# Altium PCB ESP32-PCB.PcbDoc (part 1 of 3)
Units mil, origin at the board's own origin, x right, y up, seen from the top; angles counter-clockwise.
Board outline 2800 x 1000 mil, 4 copper layers (L1, L2, L3, L4), stack 61.094 mil thick; 64 components, 76 nets, 301 pads, 135 vias.
Unrouted connection lines stored in the file: 2.
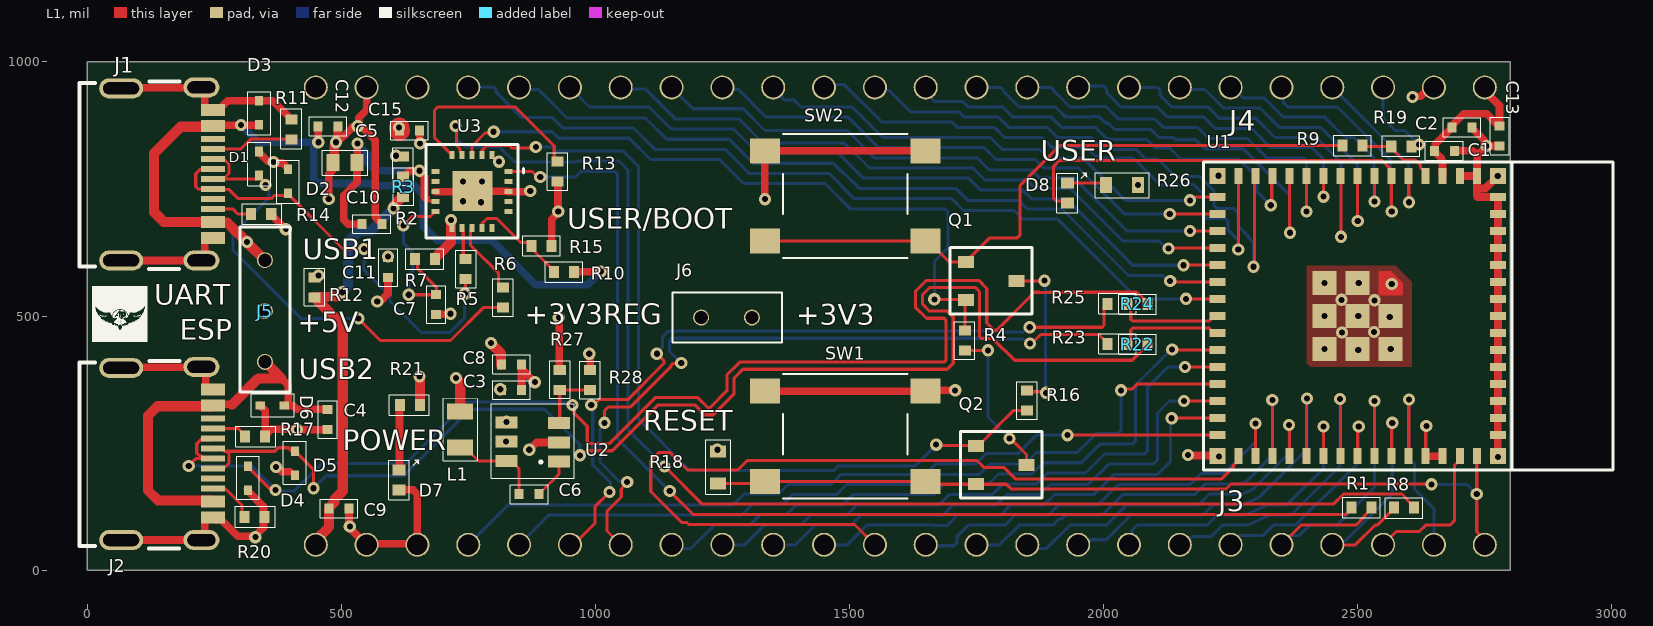
[diagram p0: L1 view]
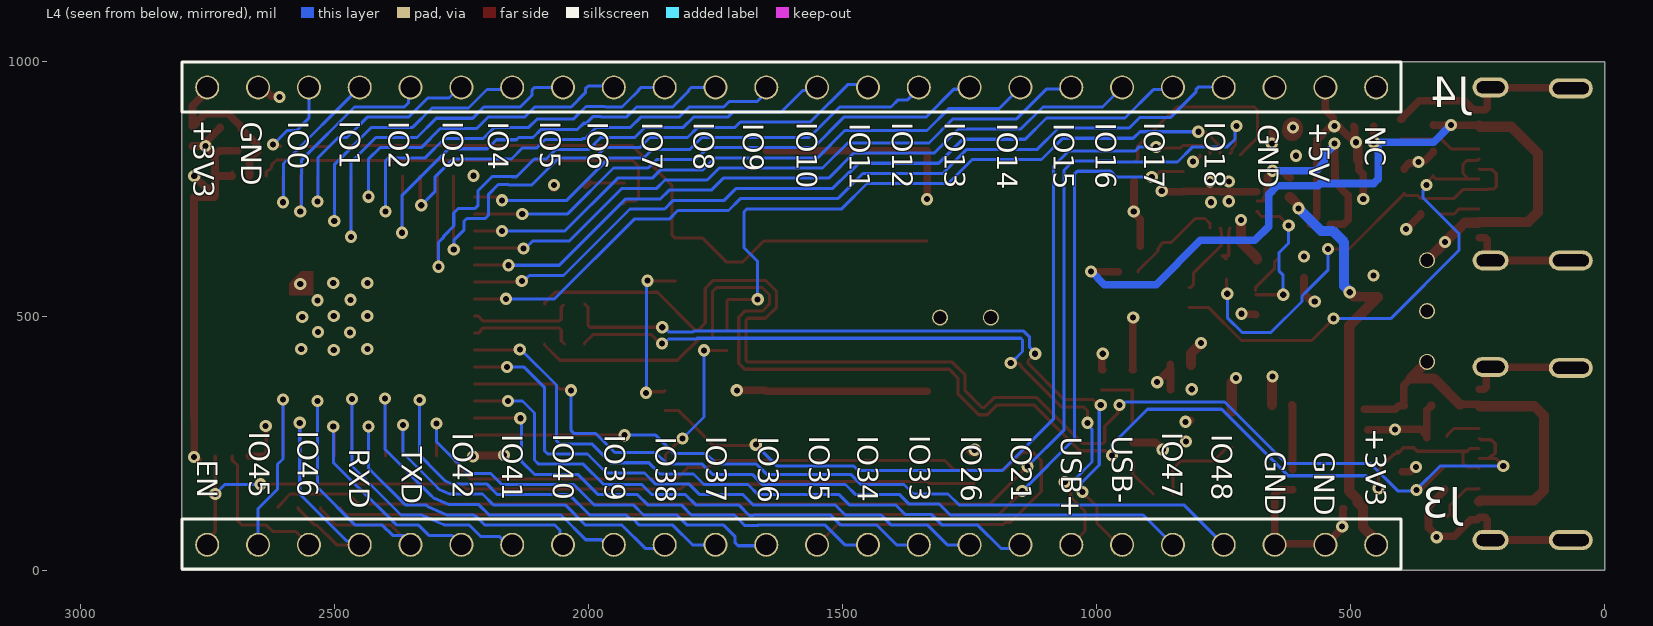
[diagram p1: L4 view, seen from below]
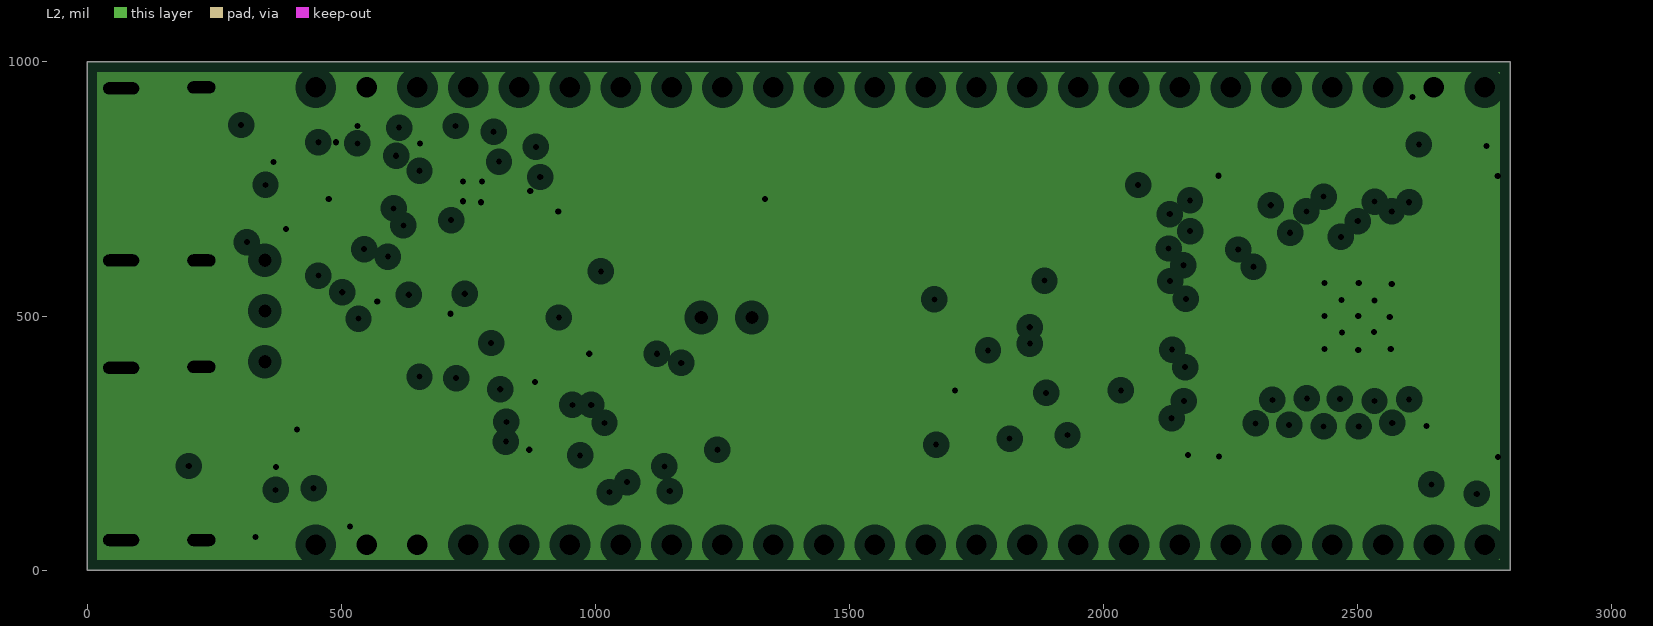
[diagram p2: L2, clearances drawn from the general rule]
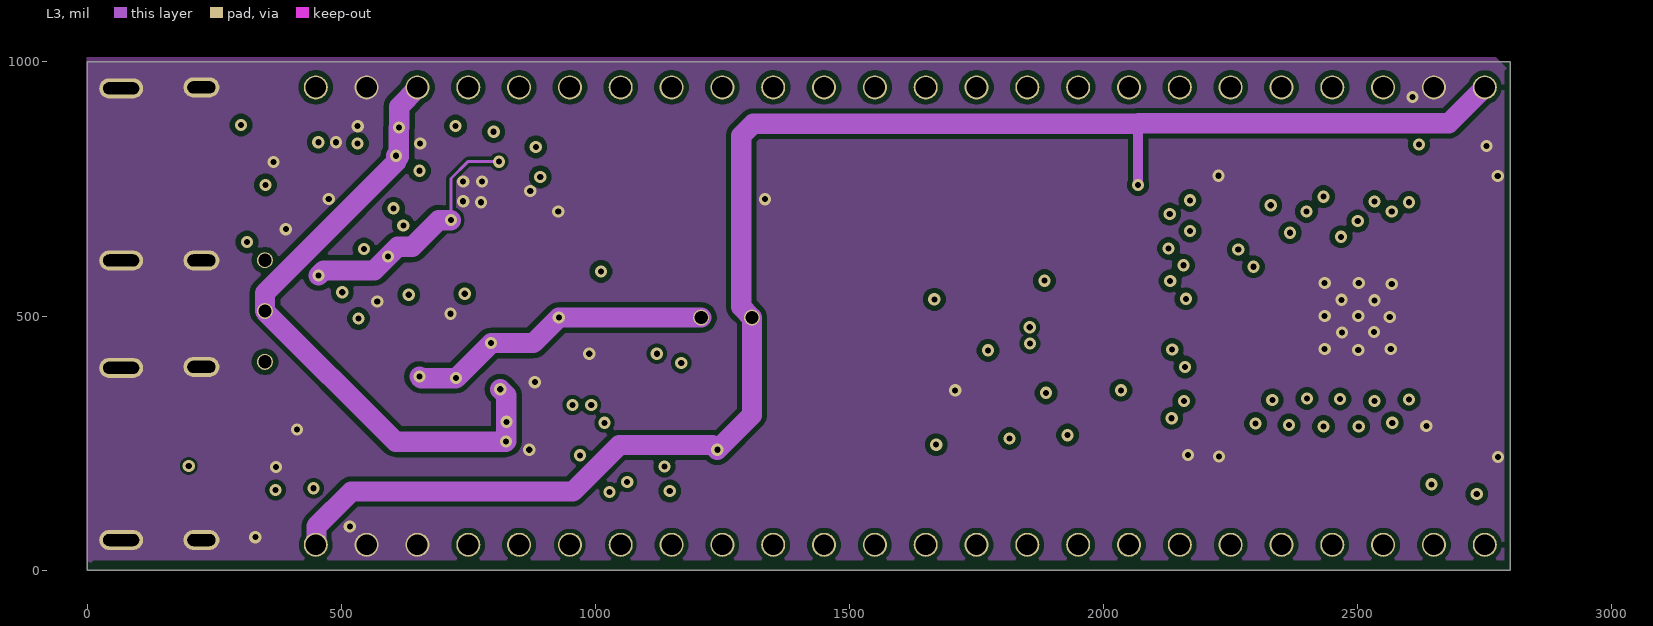
[diagram p3: L3]

## Layer stack, top to bottom
Top Solder: solder mask 0.4, Solder Resist, Dk 3.5
L1: signal copper 1.378
Dielectric 2: prepreg 3.913, PP-006, Dk 4.1
L2: plane copper 0.3543, net GND
Dielectric 1: dielectric 49.8031, FR-4, Dk 4.8
L3: signal copper 0.3543
Dielectric 3: prepreg 3.913, PP-006, Dk 4.1
L4: signal copper 1.378
Bottom Solder: solder mask 0.4, Solder Resist, Dk 3.5

## Board outline
0,0 2800,0 2800,1000 0,1000

## Design rules (kind name [scope] priority, off if disabled: settings)
Clearance SMALLER2 [WithinRoom('USB2')] p1: gap=5 ignorepadtopadclearanceinfootprint=FALSE
Clearance SMALLER1 [WithinRoom('USB1')] p2: gap=5 ignorepadtopadclearanceinfootprint=FALSE
Clearance SMALLER [WithinRoom('FTDI')] p3: gap=6 ignorepadtopadclearanceinfootprint=FALSE
Clearance "DIFF 90 CLEARANCE" [InDifferentialPairClass('DIFF90')] p4: gap=8 ignorepadtopadclearanceinfootprint=FALSE
Clearance [All] p5: gap=10 ignorepadtopadclearanceinfootprint=FALSE except(6: SMDPad-SMDPad)
ComponentClearance R25R24 [InComponent('R25') vs InComponent('R24')] p1: gap=0 collisioncheckmode=3 verticalgap=0 showdistances=FALSE
ComponentClearance R2R3 [InComponent('R2') vs InComponent('R3')] p2: gap=0 collisioncheckmode=3 verticalgap=0 showdistances=FALSE
ComponentClearance R22R23 [InComponent('R22') vs InComponent('R23')] p3: gap=0 collisioncheckmode=3 verticalgap=0 showdistances=FALSE
ComponentClearance [All] p4: gap=10 collisioncheckmode=3 verticalgap=10 showdistances=FALSE
DiffPairsRouting DIFF90 [InDifferentialPairClass('DIFF90')] p1: maxlimit=10 minlimit=8 mostfreqgap=10 toplayer_maxgap=8.1 toplayer_prefgap=8 toplayer_minwidth=6.03 toplayer_maxwidth=6.23 toplayer_prefwidth=6.03 midlayer1_mingap=10 midlayer1_minwidth=15 midlayer1_maxwidth=15 midlayer1_prefwidth=15 bottomlayer_maxgap=8.1 bottomlayer_prefgap=8 bottomlayer_minwidth=6.03 bottomlayer_maxwidth=6.23 bottomlayer_prefwidth=6.03 maxuncoupledlength=1181.1
MinimumSolderMaskSliver [All] p1: minsoldermaskwidth=5.9
PlaneClearance [All] p1: clearance=20
PlaneConnect [All] p1: planeconnectstyle=Direct reliefexpansion=20 reliefentries=4 reliefconductorwidth=10 reliefairgap=10
PolygonConnect [All] p1: connectstyle=Direct reliefconductorwidth=10 reliefentries=4 polygonreliefangle="90 Angle" airgapwidth=10
RoomDefinition USB2 [False vs False] p1: confinementstyle=ConfineIn formatcopy=TRUE lockcomponents=FALSE outline 5,438 284,438 284,11 5,11
RoomDefinition USB1 [False vs False] p2: confinementstyle=ConfineIn formatcopy=TRUE lockcomponents=FALSE outline 3,979 282,979 282,572 3,572
RoomDefinition FTDI [False] p3: confinementstyle=ConfineIn formatcopy=TRUE lockcomponents=FALSE outline 667,833 856,833 856,656 667,656
RoutingVias [All] p1: holewidth=12 width=24 viastyle="Through Hole" minholewidth=12 minwidth=24 maxholewidth=12 maxwidth=24
SilkToSilkClearance [All] p1: silktosilkclearance=6
SilkToSolderMaskClearance [IsPad] p1: minsilkscreentomaskgap=6 clearancetoexposedcopper=TRUE
SolderMaskExpansion [All] p1: expansion=4 istentingtop=FALSE
SupplyNets "Schematic Supply Nets_5" [InNet('GND')] p1: voltage=0.000
SupplyNets "Schematic Supply Nets_4" [InNet('+3V3_REG')] p2: voltage=0.000
SupplyNets "Schematic Supply Nets_3" [InNet('+5V_VBUS2')] p3: voltage=0.000
SupplyNets "Schematic Supply Nets_2" [InNet('+5V')] p4: voltage=0.000
SupplyNets "Schematic Supply Nets_1" [InNet('+3V3')] p5: voltage=0.000
SupplyNets "Schematic Supply Nets" [InNet('+5V_VBUS1')] p6: voltage=0.000
Width [All] p1: maxlimit=100 minlimit=6 preferedwidth=10 minimp=50.000000 maximp=50.000000 favimp=50.000000
23 further rules are at their usual default settings.

## Classes and differential pairs
differential pair class DIFF90: CON2_USB CON_ESP_USB ESP_USB FTDI_USB
differential pair CON_ESP_USB: +CON_ESP_USB_P -CON_ESP_USB_N
differential pair FTDI_USB: +FTDI_USB_P -FTDI_USB_N
differential pair ESP_USB: +ESP_USB_P -ESP_USB_N
differential pair CON2_USB: +CON2_USB_P -CON2_USB_N

## Components (designator, comment, footprint, x,y, rotation, side; value= is the part's Value field where it differs from the comment)
C1 "10uF/25V" CL05A106MP8NUB8 2690.37,834.84 r180 top value=10uF
C2 "100nF/50V" CL05A106MP8NUB8 2725,880.84 r180 top value=1uF
C3 "2.2uF/50V" CL05A106MP8NUB8 815,345.16 r0 top value=2.2uF
C4 "100nF/50V" CL05A106MP8NUB8 482.84,276.63 r90 top value=1uF
C5 "4.7uF/50V" CC0603KRX7R9BB104 475.88,786.25 r0 top value=100nF
C6 "100nF/50V" CL05A106MP8NUB8 850,140.16 r0 top value=1uF
C7 "100nF/50V" CL05A106MP8NUB8 696.76,502.71 r90 top value=1uF
C8 "10uF/25V" CL05A106MP8NUB8 855,414.84 r180 top value=10uF
C9 "100nF/50V" CL05A106MP8NUB8 515.37,130.84 r180 top value=1uF
C10 "100nF/50V" CL05A106MP8NUB8 580,690.84 r180 top value=1uF
C11 "100nF/50V" CL05A106MP8NUB8 601.84,575.63 r90 top value=1uF
C12 "100nF/50V" CL05A106MP8NUB8 494,882.84 r180 top value=1uF
C13 "100nF/50V" CL05A106MP8NUB8 2788.84,834.63 r90 top value=1uF
C15 "100nF/50V" CL05A106MP8NUB8 654.37,874.84 r180 top value=1uF
D1 "ESD PROTECTION" ESD5Z3.3T1G 320,833.62 r270 top
D2 "ESD PROTECTION" ESD5Z3.3T1G 376.89,799.09 r270 top
D3 "ESD PROTECTION" ESD5Z3.3T1G 320,933.62 r270 top
D4 "ESD PROTECTION" ESD5Z3.3T1G 335.11,147.16 r90 top
D5 "ESD PROTECTION" ESD5Z3.3T1G 427.11,177.16 r90 top
D6 "ESD PROTECTION" ESD5Z3.3T1G 330.91,305.89 r0 top
D7 "YELLOW GREEN" VLMG1500-GS08 596.28,213.12 r270 top
D8 "RED" VLMG1500-GS08 1911.28,777.75 r270 top
J1 "2171790001" 217179-0001 -15.55,959.06 r270 top locked
J2 "2171790001" 217179-0001 -15.55,409.06 r270 top locked
J3 "DS1021-1x24SF11-B" DS1021-1X24SF11 3442.52,-96.46 r180 bottom locked
J4 "DS1021-1x24SF11-B" DS1021-1X24SF11 3442.52,803.54 r180 bottom locked
J5 "B-2100S03P-A110" B-2100S03P-A110 350,410 r90 top
J6 "B-2100S02P-A110" B-2100S02P-A110 1159,448 r0 top
L1 "3.3uF" MLZ2012N3R3LT000 764.8,221.06 r90 top
Q1 "SS8050-G" SS8050-G 1779.2,569.4 r270 top
Q2 "SS8050-G" SS8050-G 1799.2,206.6 r270 top
R1 "0 OHM" RC0402JR 2538.39,138.55 r180 top value=0R
R2 "0 OHM" RC0402JR 606.45,825.02 r270 top value=0R
R3 "0 OHM" RC0402JR 637.55,723.61 r90 top value=0R
R4 "10k" RC0402JR 1711.45,483.02 r270 top value=10kR
R5 "27K" RC0402JR 760.55,561.61 r90 top value=27kR
R6 "27K" RC0402JR 833.55,505.61 r90 top value=27kR
R7 "0 OHM" RC0402JR 695.39,627.55 r180 top value=0R
R8 "0 OHM" RC0402JR 2559.98,107.45 r0 top value=0R
R9 "27K" RC0402JR 2458.98,820.45 r0 top value=27kR
R10 "4.7K" RC0402JR 907.61,571.45 r0 top value=4.7kR
R11 "5.1K" AC0402FR-075K1L 417.55,836.61 r90 top value=5.1kR
R12 "0 OHM" RC0402JR 462.55,525.98 r90 top value=0R
R13 "10k" RC0402JR 910.45,815.39 r270 top value=10kR
R14 "5.1K" AC0402FR-075K1L 311.98,685.45 r0 top value=5.1kR
R15 "10k" RC0402JR 925.02,653.55 r180 top value=10kR
R16 "10k" RC0402JR 1864.55,302.98 r90 top value=10kR
R17 "5.1K" AC0402FR-075K1L 299.98,247.45 r0 top value=5.1kR
R18 "1K" 0603WAF1001T5E 1263.05,153.29 r90 top
R19 "27K" RC0402JR 2616.39,849.55 r180 top value=27kR
R20 "5.1K" AC0402FR-075K1L 298.98,89.45 r0 top value=5.1kR
R21 "5.1K" AC0402FR-075K1L 666.02,340.55 r180 top value=5.1kR
R22 "0 OHM" RC0402JR 2035.98,429.45 r0 top value=0R
R23 "0 OHM" RC0402JR 2058.02,460.55 r180 top value=0R
R24 "0 OHM" RC0402JR 2035.61,508.45 r0 top value=0R
R25 "0 OHM" RC0402JR 2058.02,539.55 r180 top value=0R
R26 "1K" 0603WAF1001T5E 1987.29,735.95 r0 top
R27 "51K" RC0402JR 945.55,343.98 r90 top value=51kR
R28 "22.1K" RC0402JR 974.45,405.39 r270 top value=22.1kR
SW1 "PTS645SM43SMTR92LFS" PTS645SM43SMTR92LFS 1613.78,385.63 r180 top locked
SW2 "PTS645SM43SMTR92LFS" PTS645SM43SMTR92LFS 1613.78,858.46 r180 top locked
U1 "ESP32-S3-MINI-1U-N8" ESP32-S3-MINI-1U-N8_1 2803.15,803.15 r270 top locked
U2 "LMR50410Y3FQDBVRQ1" LMR50410Y3FQDBVRQ1 842.72,313.43 r180 top
U3 "FT231XQ-R" FT231XQ-R 679.26,667.26 r0 top

## Footprints (in the part's own frame and the unit in brackets; to place one, negate y for a bottom-side part, rotate by r counter-clockwise, add the part's x,y. Pads: shape width x height; smd on the part's side, far side on the other; paste and mask are expansions set on the pad)
0603WAF1001T5E [mm]
  rect 0.6x0.8 smd mask+0.1: 1(0.45,0.55) 2(2.05,0.56)
  silkscreen extent -0.1,-0.08 2.62,1.17, body extent 0.45,0.16 2.05,0.96, height 0.43
217179-0001 [mm]
  rect 0.6x1.2 smd mask+0: A1B12(1.35,6.68) A4B9(2.15,6.68) B1A12(7.75,6.68) B4A9(6.95,6.68)
  rect 0.3x1.2 smd mask+0: A5(3.3,6.68) A6(4.3,6.68) A7(4.8,6.68) A8(5.8,6.68) B5(6.3,6.68) B6(5.3,6.68) B7(3.8,6.68) B8(2.8,6.68)
  oval 1x1.8 hole 0.6 slot 1.4 at 90 deg mask+0: S1(0.23,6.11) S2(8.88,6.11)
  oval 1x2.2 hole 0.6 slot 1.8 at 90 deg mask+0: S3(0.28,2.1) S4(8.88,2.1)
  silkscreen extent -0.08,0 9.3,5.01, body extent 0.15,-0.25 9.09,6.51, height 1.67
AC0402FR-075K1L [mm]
  rect 0.5x0.6 smd mask+0.01: 1(0.28,0.395) 2(1.28,0.395)
  silkscreen extent -0.18,-0.13 1.8,0.91, body extent 0.28,0.15 1.28,0.65, height 0.37
B-2100S02P-A110 [mm]
  round 0.8 hole 0.66: 1(1.25,1.25) 2(3.79,1.25)
  silkscreen extent -0.18,0 5.3,2.51, body extent 0.03,-0.02 5.11,2.48, height 9.5
B-2100S03P-A110 [mm]
  round 0.8 hole 0.66: 1(0,0) 2(2.54,0) 3(5.08,0)
  silkscreen extent -1.5,-1.25 6.75,1.25, body extent -1.23,-1.3 6.39,1.2, height 9.5
CC0603KRX7R9BB104 [mm]
  rect 0.65x0.85 smd mask+0.05: 1(0.2,0.4) 2(1.4,0.4)
  silkscreen extent -0.33,-0.23 1.93,1.02, body extent 0,0 1.6,0.8, height 0.9
CL05A106MP8NUB8 [mm]
  rect 0.45x0.5 smd mask+0.05: 1(0,0.25) 2(1,0.25)
  silkscreen extent -0.43,-0.23 1.45,0.71, body extent 0,0 1,0.5, height 0.9
DS1021-1X24SF11 [mm]
  round 1.2 hole 1.02 mask+0.13: 1(17.59,3.72) 2(20.13,3.72) 3(22.67,3.72) 4(25.21,3.72) 5(27.75,3.72) 6(30.29,3.72) 7(32.83,3.72) 8(35.37,3.72) 9(37.91,3.72) 10(40.45,3.72) 11(42.99,3.72) 12(45.53,3.72) 13(48.07,3.72) 14(50.61,3.72) 15(53.15,3.72) 16(55.69,3.72) 17(58.23,3.72) 18(60.77,3.72) 19(63.31,3.72) 20(65.85,3.72) 21(68.39,3.72) 22(70.93,3.72) 23(73.47,3.72) 24(76.01,3.72)
  silkscreen extent 16.33,2.5 77.25,5, body extent 16.29,2.45 77.22,5, height 9.24
ESD5Z3.3T1G [mm]
  rect 0.48x0.4 smd mask+0: 1(0.25,0.46) 2(1.45,0.46)
  silkscreen extent -0.2,-0.1 1.96,1.04, body extent 0.05,0.06 1.65,0.86, height 0.7
ESP32-S3-MINI-1U-N8_1 [mm]
  rect 0.8x0.8 smd mask+0.05: 1(0.7,-0.7) 1(0.7,-14.7) 1(14.7,-0.7) 1(14.7,-14.7)
  rect 0.8x0.4 smd mask+0.05: 1(0.7,-1.75) 1(0.7,-2.6) 1(14.7,-4.3) 1(14.7,-3.45) 3(0.7,-3.45) 4(0.7,-4.3) 5(0.7,-5.15) 6(0.7,-6) 7(0.7,-6.85) 8(0.7,-7.7) 9(0.7,-8.55) 10(0.7,-9.4) 11(0.7,-10.25) 12(0.7,-11.1) 13(0.7,-11.95) 14(0.7,-12.8) 15(0.7,-13.65) 31(14.7,-13.65) 32(14.7,-12.8) 33(14.7,-11.95) 34(14.7,-11.1) 35(14.7,-10.25) 36(14.7,-9.4) 37(14.7,-8.55) 38(14.7,-7.7) 39(14.7,-6.85) 40(14.7,-6) 41(14.7,-5.15) 44(14.7,-2.6) 45(14.7,-1.75)
  rect 0.4x0.8 smd mask+0.05: 1(1.75,-0.7) 1(2.6,-0.7) 1(3.45,-0.7) 1(4.3,-0.7) 1(5.15,-0.7) 1(6,-0.7) 1(6.85,-0.7) 1(7.7,-0.7) 1(8.55,-0.7) 1(9.4,-0.7) 1(10.25,-0.7) 1(11.1,-0.7) 1(11.95,-0.7) 1(12.8,-0.7) 1(13.65,-0.7) 16(1.75,-14.7) 17(2.6,-14.7) 18(3.45,-14.7) 19(4.3,-14.7) 20(5.15,-14.7) 21(6,-14.7) 22(6.85,-14.7) 23(7.7,-14.7) 24(8.55,-14.7) 25(9.4,-14.7) 26(10.25,-14.7) 27(11.1,-14.7) 28(11.95,-14.7) 29(12.8,-14.7) 30(13.65,-14.7)
  rect 1.2x1.2 smd mask+0.05: 1(6.05,-9.35) 1(6.05,-7.7) 1(7.7,-9.35) 1(7.7,-7.7) 1(7.7,-6.05) 1(9.35,-9.35) 1(9.35,-7.7) 1(9.35,-6.05)
  round 0.025 smd mask+0.05: 1(6.05,-6.05)
  L1 region: 5.45,-6.05 6.06,-5.45 6.65,-5.45 6.65,-6.65 5.45,-6.65
  silkscreen extent 0,-15.4 15.4,5.05, body extent -0.01,-15.37 15.39,5.13, height 2.4
FT231XQ-R [mm]
  rect 0.4x0.25 smd mask+0.05: 1(3.8,2.975) 2(3.8,2.475) 3(3.8,1.975) 4(3.8,1.475) 5(3.8,0.975) 11(0.15,0.975) 12(0.15,1.475) 13(0.15,1.975) 14(0.15,2.475) 15(0.15,2.975)
  rect 0.25x0.4 smd mask+0.05: 6(2.975,0.15) 7(2.475,0.15) 8(1.975,0.15) 9(1.475,0.15) 10(0.975,0.15) 16(0.975,3.8) 17(1.475,3.8) 18(1.975,3.8) 19(2.475,3.8) 20(2.975,3.8)
  rect 2x2 smd mask+0.05: 21(2,2)
  silkscreen extent -0.3,-0.36 4.55,4.32, body extent -0.07,-0.07 4.03,4.03, height 0.8
LMR50410Y3FQDBVRQ1 [mm]
  rect 1.1x0.6 smd mask+0: 1(-2.175,2.525) 2(-2.175,1.575) 3(-2.175,0.6) 4(0.45,0.575) 5(0.45,1.525) 6(0.45,2.5)
  silkscreen extent -2.95,-0.36 1.19,3.35, body extent -2.27,0.08 0.53,2.98, height 1.2
MLZ2012N3R3LT000 [mm]
  rect 0.8x1.3 smd mask+0.05: 1(0.51,0.78) 2(2.31,0.78)
  silkscreen extent -0.15,-0.1 2.97,1.63, body extent 0.41,0.15 2.41,1.4, height 1.05
PTS645SM43SMTR92LFS [mm]
  rect 1.5x1.25 smd mask+0.05: 1(-0.92,5.35) 1(7.12,5.35) 3(-0.92,0.85) 3(7.12,0.85)
  silkscreen extent -0.01,0 6.2,6.2, body extent -1.38,0.07 7.62,6.07, height 4.3
RC0402JR [mm]
  rect 0.5x0.6 smd mask+0.01: 1(0.28,0.395) 2(1.28,0.395)
  silkscreen extent -0.15,-0.13 1.73,0.89, body extent 0.28,0.15 1.28,0.65, height 0.37
SS8050-G [mm]
  rect 0.6x0.8 smd: 1(0,1.25) 2(-0.95,-1.275) 3(0.95,-1.275)
  silkscreen extent -1.68,-2.06 1.65,2.03, body extent -1.46,-1.19 1.44,1.21, height 1.15
VLMG1500-GS08 [mm]
  rect 0.55x0.65 smd mask+0.05: 1(0.4,0.45) 2(1.4,0.45)
  silkscreen extent -0.1,-0.08 1.88,1.42, body extent 0.41,0.21 1.41,0.71, height 0.36

## Part data
C1 C8: library part CL05A106MP8NUB8, "Ceramic Capacitor, Multilayer, Ceramic, 10V, 20% +Tol, 20% -Tol, X5R, 15% TC, 10uF, Surface Mount, 0402", Capacitor Type=Ceramic, Case/Package=0402, LCSCPART NUMBER=C307415, Manufacturer=Samsung, Max Operating Temperature=85°C, Min Operating Temperature=-55°C, Package Shape=Rectangular, Rated DC Voltage (URdc)=10V, Supplier Part Number=187-CL05A106MP8NUB8, Temperature Characteristics Code=X5R, Tolerance  (fill in as +-)=20%, Category="Ceramic Capacitors", ComponentLink1Description=https://datasheet.ciiva.com:443/pdfs/VipMasterIC/IC/SEMS/SEMS-S-A0008521219/SEMS-S-A0008521325-1.pdf?src-supplier=IHS+Markit, ComponentLink1URL=https://datasheet.ciiva.com:443/pdfs/VipMasterIC/IC/SEMS/SEMS-S-A0008521219/SEMS-S-A0008521325-1.pdf?src-supplier=IHS+Markit, ComponentLink2Description=http://www.samsungsem.com/kr/support/product-search/mlcc/CL05A106MP8NUB8.jsp?src-supplier=Digikey, ComponentLink2URL=http://www.samsungsem.com/kr/support/product-search/mlcc/CL05A106MP8NUB8.jsp?src-supplier=Digikey, ComponentLink3Description=https://datasheet.octopart.com/CL05A106MP8NUB8-Samsung-Electro-Mechanics-datasheet-136460857.pdf?src-supplier=Future+Electronics, ComponentLink3URL=https://datasheet.octopart.com/CL05A106MP8NUB8-Samsung-Electro-Mechanics-datasheet-136460857.pdf?src-supplier=Future+Electronics, Dielectric Material=Ceramic, JESD-609 Code=e3, Manufacturer Part Number=CL05A106MP8NUB8, Mounting Technology="Surface Mount", Multilayer=Yes, Packaging="Tape and Reel", Pins=2, Pricing="1=0.32, 10=0.159, 50=0.159, 100=0.102, 1000=0.086, 10000=0.067 (USD)", Reach SVHC Compliant=Yes, RoHS=Yes, RoHS Compliant=Yes, Stock=496808, Supplier=Mouser, Terminal Finish=Nickel, Termination=Wraparound, Tolerance (fill in as +-)=20%
C2 C4 C6 C7 C9 C10 C11 C12 C13 C15: library part CL10A105KP8NNNC, "Ceramic Capacitor, Multilayer, Ceramic, 10V, 10% +Tol, 10% -Tol, X5R, 15% TC, 1uF, Surface Mount, 0603", Capacitor Type=Ceramic, Case/Package=0603, LCSC PART NUMBER=C14445, Manufacturer=Samsung, Max Operating Temperature=85°C, Min Operating Temperature=-55°C, Package Shape=Rectangular, Package Style=SMTMeter, Rated DC Voltage (URdc)=10V, Supplier Part Number=187-CL10A105KP8NNNC, Temperature Characteristics Code=X5R, Tolerance  (fill in as +-)=10%, Category="Ceramic Capacitors", ComponentLink1Description=https://datasheet.ciiva.com:443/pdfs/VipMasterIC/IC/SEMS/SEMS-S-A0008521003/SEMS-S-A0008520845-1.pdf?src-supplier=IHS+Markit, ComponentLink1URL=https://datasheet.ciiva.com:443/pdfs/VipMasterIC/IC/SEMS/SEMS-S-A0008521003/SEMS-S-A0008520845-1.pdf?src-supplier=IHS+Markit, ComponentLink2Description=https://datasheet.ciiva.com/15195/getdatasheetpartid-358616-15195708.pdf?src-supplier=Verical, ComponentLink2URL=https://datasheet.ciiva.com/15195/getdatasheetpartid-358616-15195708.pdf?src-supplier=Verical, ComponentLink3Description=https://datasheet.ciiva.com/16358/cl05b104kq5nnnc-16358431.pdf?src-supplier=Future+Electronics, ComponentLink3URL=https://datasheet.ciiva.com/16358/cl05b104kq5nnnc-16358431.pdf?src-supplier=Future+Electronics, Dielectric Material=Ceramic, Height=0.9mm, JESD-609 Code=e3, Length=1.6mm, Manufacturer Part Number=CL10A105KP8NNNC, Mounting Technology="Surface Mount", Multilayer=Yes, Packaging="Tape and Reel", Pins=2, Pricing="1=0.1, 10=0.018, 50=0.018, 100=0.011, 1000=0.009, 10000=0.005 (USD)", Reach SVHC Compliant=Yes, RoHS=Yes, RoHS Compliant=Yes, Stock=76214, Supplier=Mouser, Terminal Finish=Nickel, Termination=Wraparound, Tolerance (fill in as +-)=10%, Width=0.8mm
C3: library part CL10A225KB8NNNC, "Ceramic Capacitor, Multilayer, Ceramic, 50V, 10% +Tol, 10% -Tol, X5R, 15% TC, 2.2uF, Surface Mount, 0603", Capacitor Type=Ceramic, Case/Package=0603, LCSC PART NUMBER=C913904, Manufacturer=Samsung, Max Operating Temperature=85°C, Min Operating Temperature=-55°C, Package Shape=Rectangular, Rated DC Voltage (URdc)=50V, Temperature Characteristics Code=X5R, Tolerance  (fill in as +-)=10%, Category="Ceramic Capacitors", ComponentLink1Description=https://datasheet.ciiva.com:443/pdfs/VipMasterIC/IC/SEMS/SEMS-S-A0008526420/SEMS-S-A0008525294-1.pdf?src-supplier=IHS+Markit, ComponentLink1URL=https://datasheet.ciiva.com:443/pdfs/VipMasterIC/IC/SEMS/SEMS-S-A0008526420/SEMS-S-A0008525294-1.pdf?src-supplier=IHS+Markit, Dielectric Material=Ceramic, Manufacturer Part Number=CL10A225KB8NNNC, Mounting Technology="Surface Mount", Multilayer=Yes, Packaging="Tape and Reel", Pins=2, Pricing="20=0.0212, 200=0.017, 600=0.0152, 4000=0.0117, 8000=0.0111, 20000=0.0108 (USD)", Reach SVHC Compliant=Yes, RoHS=Yes, RoHS Compliant=Yes, Stock=400299, Supplier=LCSC, Supplier Part Number=C913904, Termination=Wraparound, Tolerance (fill in as +-)=10%
C5: library part CC0603KRX7R9BB104, "Ceramic Capacitor, Multilayer, Ceramic, 50V, 10% +Tol, 10% -Tol, X7R, 15% TC, 0.1uF, Surface Mount, 0603", Capacitor Type=Ceramic, Case/Package=0603, LCSC PART NUMBER=C14663, Manufacturer=Yageo, Max Operating Temperature=125°C, Min Operating Temperature=-55°C, Package Shape=Rectangular, Package Style=SMTMeter, Rated DC Voltage (URdc)=50V, Supplier Part Number=3035896, Temperature Characteristics Code=X7R, Tolerance  (fill in as +-)=10%, Category="Ceramic Capacitors", ComponentLink1Description=https://datasheet.ciiva.com:443/pdfs/VipMasterIC/IC/YAGO/YAGO-S-A0003557223/YAGO-S-A0003557223-1.pdf?src-supplier=IHS+Markit, ComponentLink1URL=https://datasheet.ciiva.com:443/pdfs/VipMasterIC/IC/YAGO/YAGO-S-A0003557223/YAGO-S-A0003557223-1.pdf?src-supplier=IHS+Markit, ComponentLink2Description=https://datasheet.ciiva.com/11786/0900766b80d84f1d-11786061.pdf?src-supplier=Rs, ComponentLink2URL=https://datasheet.ciiva.com/11786/0900766b80d84f1d-11786061.pdf?src-supplier=Rs, ComponentLink3Description=https://datasheet.ciiva.com/8033/70765-8033819.pdf?src-supplier=Element14, ComponentLink3URL=https://datasheet.ciiva.com/8033/70765-8033819.pdf?src-supplier=Element14, ComponentLink4Description=https://datasheet.ciiva.com/8033/70765-8033821.pdf?src-supplier=Element14, ComponentLink4URL=https://datasheet.ciiva.com/8033/70765-8033821.pdf?src-supplier=Element14, ComponentLink5Description=https://datasheet.ciiva.com/7978/1489800-7978166.pdf?src-supplier=Element14, ComponentLink5URL=https://datasheet.ciiva.com/7978/1489800-7978166.pdf?src-supplier=Element14, ComponentLink6Description=https://datasheet.ciiva.com/31394/1489800-31394927.pdf?src-supplier=Farnell, ComponentLink6URL=https://datasheet.ciiva.com/31394/1489800-31394927.pdf?src-supplier=Farnell, ComponentLink7Description=https://datasheet.ciiva.com/22749/1489800-22749214.pdf?src-supplier=Element14, ComponentLink7URL=https://datasheet.ciiva.com/22749/1489800-22749214.pdf?src-supplier=Element14, ComponentLink8Description=https://datasheet.ciiva.com/144/mlccorderingcode-144177.pdf?src-supplier=Digikey, ComponentLink8URL=https://datasheet.ciiva.com/144/mlccorderingcode-144177.pdf?src-supplier=Digikey, ComponentLink9Description=https://datasheet.ciiva.com/144/mlccorderingcode-144176.pdf?src-supplier=Digikey, ComponentLink9URL=https://datasheet.ciiva.com/144/mlccorderingcode-144176.pdf?src-supplier=Digikey, ComponentLink10Description=https://datasheet.ciiva.com/144/mlccorderingcode-144178.pdf?src-supplier=Digikey, ComponentLink10URL=https://datasheet.ciiva.com/144/mlccorderingcode-144178.pdf?src-supplier=Digikey, Dielectric Material=Ceramic, Height=0.8mm, JESD-609 Code=e3, Length=1.6mm, Manufacturer Part Number=CC0603KRX7R9BB104, Mounting Technology="Surface Mount", Multilayer=Yes, Packaging="Tape and Reel", Pins=2, Pricing="4000=0.0049, 16000=0.0047, 60000=0.0045, 160000=0.0044, 400000=0.0042 (USD)", Reach SVHC Compliant=Yes, RoHS=Yes, RoHS Compliant=Yes, Stock=11484000, Supplier="Future Electronics", Terminal Finish=Nickel, Termination=Wraparound, Tolerance (fill in as +-)=10%, Width=0.8mm
D1 D2 D3 D4 D5 D6: library part ESD5Z3.3T1G, "Trans Voltage Suppressor Diode, 158W, 3.3V V(RWM), Unidirectional, 1 Element, Silicon", Clamping Voltage-Max=8.4V, LCSC PART NUMBER=C61148, Manufacturer="ON Semiconductor", Max Operating Temperature=150°C, Max Power Dissipation=200mW, Min Breakdown Voltage=5V, Min Operating Temperature=-55°C, Non-rep Peak Rev Power Dis-Max=158W, Package Body Material=Plastic, Package Shape=Rectangular, Package Style="SMALL OUTLINEMeter", Rep Pk Reverse Voltage-Max=3.3V, Supplier Part Number=8196941, Additional Feature="UL RECOGNIZED", Category="ESD and Circuit Protection ICs", ComponentLink1Description=https://datasheet.ciiva.com:443/pdfs/VipMasterIC/IC/ONSM/ONSM-S-A0006325923/ONSM-S-A0006325923-1.pdf?src-supplier=IHS+Markit, ComponentLink1URL=https://datasheet.ciiva.com:443/pdfs/VipMasterIC/IC/ONSM/ONSM-S-A0006325923/ONSM-S-A0006325923-1.pdf?src-supplier=IHS+Markit, Diode Element Material=SILICON, Diode Type="TRANS VOLTAGE SUPPRESSOR", JESD-30 Code=R-PDSO-F2, JESD-609 Code=e3, Manufacturer Part Number=ESD5Z3.3T1G, Moisture Sensitivity Level=1, Number of Elements=1, Pins=2, Polarity=Unidirectional, Pricing="3000=0.0569, 9000=0.0547, 15000=0.0538, 45000=0.0518, 75000=0.05 (USD)", Qualification Status="Not Qualified", Reach SVHC Compliant=Yes, Reference Standard=IEC-61000-4-2, RoHS=Yes, RoHS Compliant=Yes, Stock=1197000, Supplier="Future Electronics", Surface Mount=Yes, Technology=AVALANCHE, Terminal Finish=Tin, Terminal Form=Flat, Terminal Position=DUAL
D7: library part VLMG1500-GS08, "Single Color LED, Yellow Green, 0.5mm", Color=Green,Yellow, Color@wavelength=Green, Forward Current=30mA, Forward Voltage=2.4V, LCSC PART NUMBER=C511404, Manufacturer=Vishay, Max Operating Temperature=85°C, Min Operating Temperature=-30°C, Reverse Voltage-Max=5V, Supplier Part Number=2044562, Category=LEDs, Channels=1, ComponentLink1Description=https://datasheet.ciiva.com:443/pdfs/VipMasterIC/IC/VISH/VISH-S-A0003457490/VISH-S-A0003457490-1.pdf?src-supplier=IHS+Markit, ComponentLink1URL=https://datasheet.ciiva.com:443/pdfs/VipMasterIC/IC/VISH/VISH-S-A0003457490/VISH-S-A0003457490-1.pdf?src-supplier=IHS+Markit, ComponentLink2Description=https://datasheet.ciiva.com/12071/vlmo1500-244705-12071911.pdf?src-supplier=Mouser, ComponentLink2URL=https://datasheet.ciiva.com/12071/vlmo1500-244705-12071911.pdf?src-supplier=Mouser, ComponentLink3Description=https://datasheet.ciiva.com/30005/vlmo1500-30005134.pdf?src-supplier=Avnet, ComponentLink3URL=https://datasheet.ciiva.com/30005/vlmo1500-30005134.pdf?src-supplier=Avnet, Luminous Intensity-Nom=90mcd, Manufacturer Part Number=VLMG1500-GS08, Mounting Technology="Surface Mount", Optoelectronic Device Type="SINGLE COLOR LED", Overall Height=0.35mm, Packaging="Tape and Reel", Pins=2, Pricing="3000=0.0548, 6000=0.0534, 12000=0.0521, 15000=0.0516, 45000=0.0491 (USD)", Reach SVHC Compliant=Yes, RoHS=Yes, RoHS Compliant=Yes, Shape=Rectangular, Size=0.5mm, Stock=30000, Supplier="Future Electronics", Terminal Pitch=0.95mm, Viewing Angle=130°
D8: library part VLMS1500-GS08, "Single Color LED, Super Red, 0.5mm", Color=Red, Forward Current=30mA, Forward Voltage=2.4V, LCSC PART NUMBER=C511370, Manufacturer=Vishay, Max Operating Temperature=85°C, Min Operating Temperature=-30°C, Reverse Voltage-Max=5V, Supplier Part Number=78-VLMS1500-GS08, Category=LEDs, Channels=1, Color@wavelength=Red, ComponentLink1Description=https://datasheet.ciiva.com:443/pdfs/VipMasterIC/IC/VISH/VISH-S-A0003457490/VISH-S-A0003457490-1.pdf?src-supplier=IHS+Markit, ComponentLink1URL=https://datasheet.ciiva.com:443/pdfs/VipMasterIC/IC/VISH/VISH-S-A0003457490/VISH-S-A0003457490-1.pdf?src-supplier=IHS+Markit, ComponentLink2Description=http://www.farnell.com/datasheets/1809983.pdf?src-supplier=Farnell, ComponentLink2URL=http://www.farnell.com/datasheets/1809983.pdf?src-supplier=Farnell, ComponentLink3Description=http://www.mouser.com/ds/2/427/vlmo1500-244705.pdf?src-supplier=Mouser, ComponentLink3URL=http://www.mouser.com/ds/2/427/vlmo1500-244705.pdf?src-supplier=Mouser, ComponentLink4Description=http://www.alliedelec.com/m/d/cfc385e1097fc985ee9a50a3551ac188.pdf?src-supplier=Allied+Electronics, ComponentLink4URL=http://www.alliedelec.com/m/d/cfc385e1097fc985ee9a50a3551ac188.pdf?src-supplier=Allied+Electronics, ComponentLink5Description=https://datasheet.octopart.com/VLMS1500-GS08-Vishay-datasheet-62332426.pdf?src-supplier=Newark, ComponentLink5URL=https://datasheet.octopart.com/VLMS1500-GS08-Vishay-datasheet-62332426.pdf?src-supplier=Newark, ComponentLink6Description=https://datasheet.octopart.com/VLMS1500-GS08-Vishay-datasheet-33014519.pdf?src-supplier=Element14, ComponentLink6URL=https://datasheet.octopart.com/VLMS1500-GS08-Vishay-datasheet-33014519.pdf?src-supplier=Element14, ComponentLink7Description=http://datasheet.octopart.com/VLMS1500-GS08-Vishay-datasheet-21227148.pdf?src-supplier=Avnet, ComponentLink7URL=http://datasheet.octopart.com/VLMS1500-GS08-Vishay-datasheet-21227148.pdf?src-supplier=Avnet, ComponentLink8Description=http://www.farnell.com/datasheets/1809983.pdf?src-supplier=Newark, ComponentLink8URL=http://www.farnell.com/datasheets/1809983.pdf?src-supplier=Newark, ComponentLink9Description=http://www.farnell.com/datasheets/2050839.pdf?src-supplier=Newark, ComponentLink9URL=http://www.farnell.com/datasheets/2050839.pdf?src-supplier=Newark, ComponentLink10Description=https://datasheet.octopart.com/VLMS1500-GS08-Vishay-datasheet-21227148.pdf?src-supplier=Future+Electronics, ComponentLink10URL=https://datasheet.octopart.com/VLMS1500-GS08-Vishay-datasheet-21227148.pdf?src-supplier=Future+Electronics, ComponentLink11Description=http://datasheet.octopart.com/VLMS1500-GS08-Vishay-datasheet-21227148.pdf?src-supplier=Quest, ComponentLink11URL=http://datasheet.octopart.com/VLMS1500-GS08-Vishay-datasheet-21227148.pdf?src-supplier=Quest, ComponentLink12Description=http://datasheet.octopart.com/VLMS1500-GS08-Vishay-datasheet-21227148.pdf?src-supplier=NAC+Semi, ComponentLink12URL=http://datasheet.octopart.com/VLMS1500-GS08-Vishay-datasheet-21227148.pdf?src-supplier=NAC+Semi, ComponentLink13Description=http://datasheet.octopart.com/VLMS1500-GS08-Vishay-datasheet-21227148.pdf?src-supplier=LCSC, ComponentLink13URL=http://datasheet.octopart.com/VLMS1500-GS08-Vishay-datasheet-21227148.pdf?src-supplier=LCSC, Luminous Intensity-Nom=54mcd, Manufacturer Part Number=VLMS1500-GS08, Mounting Technology="Surface Mount", Optoelectronic Device Type="SINGLE COLOR LED", Overall Height=0.35mm, Packaging="Tape and Reel", Pins=2, Pricing="1=0.34, 10=0.263, 50=0.263, 100=0.1, 1000=0.089, 10000=0.061 (USD)", Reach SVHC Compliant=Yes, RoHS=Yes, RoHS Compliant=Yes, Shape=Rectangular, Size=0.5mm, Stock=45181, Supplier=Mouser, Terminal Pitch=0.95mm, Viewing Angle=130°
J1 J2: library part 217179-0001, "USB Type C - Connector, Top-mount SMT, 16pos", LCSC PART NUMBER=C3197684, Manufacturer=Molex, Supplier Part Number=3702965, Category="USB Connectors", Manufacturer Part Number=217179-0001, Pricing="1=0.817, 10=0.645, 50=0.57, 100=0.494, 500=0.484, 1000=0.474 (GBP)", RoHS=No, Stock=10084, Supplier=Farnell
J3 J4: LCSC PART NUMBER=C7430380, Manufacturer="Ningbo Connfly Electric", Manufacturer Part Number=DS1021-1x24SF11-B, Pricing="5=0.1027, 50=0.0832, 200=0.0735, 400=0.0662, 2400=0.0603, 5000=0.0574 (USD)", RoHS=No, Stock=439, Supplier=LCSC, Supplier Part Number=C7430380
J5: LCSC PART NUMBER=C124376, Manufacturer=CKMTW, Category=Uncategorized, Manufacturer Part Number=B-2100S03P-A110, Pricing="20=0.0269, 200=0.0224, 600=0.0198, 5000=0.0157, 10000=0.0144, 20000=0.0137 (USD)", RoHS=No, Stock=20930, Supplier=LCSC, Supplier Part Number=C124376
J6: LCSC PART NUMBER=C124375, Manufacturer=CKMTW, Category=Uncategorized, Manufacturer Part Number=B-2100S02P-A110, Pricing="20=0.0234, 200=0.0192, 600=0.0169, 5000=0.0141, 10000=0.0128, 20000=0.0122 (USD)", RoHS=No, Stock=171541, Supplier=LCSC, Supplier Part Number=C124375
L1: library part MLZ2012N3R3LT000, "General Purpose Inductor, 3.3uH, 20%, 1 Element, Ferrite-Core, SMD, 0805", Case/Size Code=0805, DC Resistance (DCR)=150mR, Inductance-Nom (L)=3.3uH, Inductor Type="GENERAL PURPOSE INDUCTOR", LCSC PART NUMBER=C2041461, Manufacturer=TDK, Manufacturer Series=MLZ, Max Current Rating=130mA, Max Operating Temperature=125°C, Min Operating Temperature=-55°C, Package Height=0.85mm, Package Length=2mm, Package Style=SMTMeter, Package Width=1.25mm, Self Resonant Frequency=90MHz, Supplier Part Number=445-6759-2-ND, Tolerance=20%, Category="Fixed Inductors", ComponentLink1Description=https://datasheet.ciiva.com:443/pdfs/VipMasterIC/IC/TDKC/TDKC-S-A0006811741/TDKC-S-A0006811741-1.pdf?src-supplier=IHS+Markit, ComponentLink1URL=https://datasheet.ciiva.com:443/pdfs/VipMasterIC/IC/TDKC/TDKC-S-A0006811741/TDKC-S-A0006811741-1.pdf?src-supplier=IHS+Markit, ComponentLink2Description=https://datasheet.ciiva.com/29690/inductor-commercial-decoupling-mlz-en-29690333.pdf?src-supplier=Digikey, ComponentLink2URL=https://datasheet.ciiva.com/29690/inductor-commercial-decoupling-mlz-en-29690333.pdf?src-supplier=Digikey, ComponentLink3Description=https://datasheet.ciiva.com/29690/inductor-commercial-decoupling-mlz-en-29690334.pdf?src-supplier=Digikey, ComponentLink3URL=https://datasheet.ciiva.com/29690/inductor-commercial-decoupling-mlz-en-29690334.pdf?src-supplier=Digikey, ComponentLink4Description=https://datasheet.ciiva.com/29690/inductor-commercial-decoupling-mlz-en-29690335.pdf?src-supplier=Digikey, ComponentLink4URL=https://datasheet.ciiva.com/29690/inductor-commercial-decoupling-mlz-en-29690335.pdf?src-supplier=Digikey, Construction="Multilayer Chip", Core Material=Ferrite, Manufacturer Part Number=MLZ2012N3R3LT000, Packaging="Tape and Reel", Pricing="4000=0.04378, 8000=0.0412, 12000=0.03991, 28000=0.03863, 100000=0.03734 (USD)", Reach SVHC Compliant=Yes, RoHS=Yes, RoHS Compliant=Yes, Series=MLZ2012, Stock=44000, Supplier=Digikey
Q1 Q2: "Small Signal Bipolar Transistor, 1.5A I(C), 25V V(BR)CEO, 1-Element, NPN, Silicon", LCSC PART NUMBER=C164885, Manufacturer=Comchip, Supplier Part Number=750-SS8050-G, Category=Transistors, ComponentLink1Description=https://datasheet.ciiva.com:443/pdfs/VipMasterIC/IC/COMC/COMC-S-A0004994192/COMC-S-A0004994192-1.pdf?src-supplier=IHS+Markit, ComponentLink1URL=https://datasheet.ciiva.com:443/pdfs/VipMasterIC/IC/COMC/COMC-S-A0004994192/COMC-S-A0004994192-1.pdf?src-supplier=IHS+Markit, ComponentLink2Description="http://www.comchiptech.com/admin/files/product/SS8050-G RevA181526.pdf?src-supplier=Digikey", ComponentLink2URL="http://www.comchiptech.com/admin/files/product/SS8050-G RevA181526.pdf?src-supplier=Digikey", Manufacturer Part Number=SS8050-G, Pricing="1=0.29, 10=0.2, 50=0.2, 100=0.082, 1000=0.057, 10000=0.037 (USD)", Reach SVHC Compliant=Yes, RoHS=Yes, RoHS Compliant=Yes, Stock=4983, Supplier=Mouser
R1 R2 R3 R7 R8 R12 R22 R23 R24 R25: library part RC0402JR-070RL, "Metal Glaze/thick Film, 0.0625W, 0ohm, Surface Mount, 0402", Case/Package=0402, LCSC PART NUMBER=C60485, Manufacturer=Yageo, Max Operating Temperature=155°C, Min Operating Temperature=-55°C, Package Height=0.35mm, Package Length=1mm, Package Shape=Rectangular, Package Style=SMTMeter, Package Width=0.5mm, Power=62.5mW, Rated Temperature=70°C, Resistor Type="FIXED RESISTOR", Supplier Part Number=3375797, Category="Chip SMD Resistors", ComponentLink1Description=https://datasheet.ciiva.com:443/pdfs/VipMasterIC/IC/YAGO/YAGO-S-A0008145938/YAGO-S-A0008145938-1.pdf?src-supplier=IHS+Markit, ComponentLink1URL=https://datasheet.ciiva.com:443/pdfs/VipMasterIC/IC/YAGO/YAGO-S-A0008145938/YAGO-S-A0008145938-1.pdf?src-supplier=IHS+Markit, Construction=Chip, JESD-609 Code=e3, Manufacturer Part Number=RC0402JR-070RL, Mounting Technology="Surface Mount", Packaging="Tape and Reel", Pins=2, Pricing="10000=0.0011, 50000=0.0011, 250000=0.001, 500000=0.001, 1500000=0.0009 (USD)", Reach SVHC Compliant=Yes, RoHS=Yes, RoHS Compliant=Yes, Stock=38530000, Supplier="Future Electronics", Technology="METAL GLAZE/THICK FILM", Terminal Finish=Nickel, Termination=Wraparound
R4 R13 R15 R16: library part RMCF0402FT10K0, "Fixed Resistor, Metal Glaze/thick Film, 0.063W, 10000ohm, 50V, 1% +/-Tol, 100ppm/Cel, Surface Mount, 0402", Case/Package=0402, LCSC PART NUMBER=C6111655, Manufacturer="Stackpole Electronics", Max Operating Temperature=155°C, Min Operating Temperature=-55°C, Package Height=0.3mm, Package Length=1mm, Package Shape=Rectangular, Package Style=SMTMeter, Package Width=0.5mm, Power=63mW, Rated Temperature=70°C, Resistor Type="FIXED RESISTOR", Supplier Part Number=708-RMCF0402FT10K0, Temperature Coefficient=100ppm/°C, Tolerance=1%, Working Voltage=50V, Category="Chip SMD Resistors", ComponentLink1Description=https://datasheet.ciiva.com:443/pdfs/VipMasterIC/IC/SEIE/SEIE-S-A0009541969/SEIE-S-A0009541969-1.pdf?src-supplier=IHS+Markit, ComponentLink1URL=https://datasheet.ciiva.com:443/pdfs/VipMasterIC/IC/SEIE/SEIE-S-A0009541969/SEIE-S-A0009541969-1.pdf?src-supplier=IHS+Markit, ComponentLink2Description=https://datasheet.ciiva.com/24341/sei-rmcp-24341800.pdf?src-supplier=Onlinecomponents.com, ComponentLink2URL=https://datasheet.ciiva.com/24341/sei-rmcp-24341800.pdf?src-supplier=Onlinecomponents.com, Construction=Rectangular, JESD-609 Code=e3, Manufacturer Part Number=RMCF0402FT10K0, Mounting Technology="Surface Mount", Packaging="Tape and Reel", Pins=2, Pricing="1=0.1, 10=0.012, 50=0.012, 100=0.006, 1000=0.005, 10000=0.002 (USD)", Reach SVHC Compliant=Yes, Reference Standard=AEC-Q200, RoHS=Yes, RoHS Compliant=Yes, Stock=4866800, Supplier=Mouser, Technology="METAL GLAZE/THICK FILM", Terminal Finish=Nickel, Termination=Wraparound
R5 R6 R9 R19: library part RC0402JR-0727KL, "Fixed Resistor, Metal Glaze/thick Film, 0.0625W, 27000ohm, 50V, 5% +/-Tol, 100ppm/Cel, Surface Mount, 0402", Case/Package=0402, LCSC PART NUMBER=C137891, Manufacturer=Yageo, Max Operating Temperature=155°C, Min Operating Temperature=-55°C, Package Height=0.35mm, Package Length=1mm, Package Shape=Rectangular, Package Style=SMTMeter, Package Width=0.5mm, Power=62.5mW, Rated Temperature=70°C, Resistor Type="FIXED RESISTOR", Supplier Part Number=7019441, Temperature Coefficient=100ppm/°C, Tolerance=5%, Working Voltage=50V, Additional Feature="LASER TRIMMABLE", Category="Chip SMD Resistors", ComponentLink1Description=https://datasheet.ciiva.com:443/pdfs/VipMasterIC/IC/YAGO/YAGO-S-A0008145938/YAGO-S-A0008145938-1.pdf?src-supplier=IHS+Markit, ComponentLink1URL=https://datasheet.ciiva.com:443/pdfs/VipMasterIC/IC/YAGO/YAGO-S-A0008145938/YAGO-S-A0008145938-1.pdf?src-supplier=IHS+Markit, ComponentLink2Description=https://datasheet.ciiva.com/2452/pyu-r-int-thick-7-2452717.pdf?src-supplier=Digikey, ComponentLink2URL=https://datasheet.ciiva.com/2452/pyu-r-int-thick-7-2452717.pdf?src-supplier=Digikey, ComponentLink3Description=https://datasheet.ciiva.com/2452/pyu-r-int-thick-7-2452718.pdf?src-supplier=Digikey, ComponentLink3URL=https://datasheet.ciiva.com/2452/pyu-r-int-thick-7-2452718.pdf?src-supplier=Digikey, ComponentLink4Description=https://datasheet.ciiva.com/2452/pyu-r-int-thick-7-2452716.pdf?src-supplier=Digikey, ComponentLink4URL=https://datasheet.ciiva.com/2452/pyu-r-int-thick-7-2452716.pdf?src-supplier=Digikey, ComponentLink5Description=https://datasheet.ciiva.com/7850/1018594-7850186.pdf?src-supplier=Element14, ComponentLink5URL=https://datasheet.ciiva.com/7850/1018594-7850186.pdf?src-supplier=Element14, ComponentLink6Description=https://datasheet.ciiva.com/7850/1018594-7850187.pdf?src-supplier=Element14, ComponentLink6URL=https://datasheet.ciiva.com/7850/1018594-7850187.pdf?src-supplier=Element14, ComponentLink7Description=https://datasheet.ciiva.com/16741/pyu-rc0402-51-rohs-l-6-r-16741390.pdf?src-supplier=Future+Electronics, ComponentLink7URL=https://datasheet.ciiva.com/16741/pyu-rc0402-51-rohs-l-6-r-16741390.pdf?src-supplier=Future+Electronics, ComponentLink8Description=https://datasheet.ciiva.com/15189/getdatasheetpartid-329469-15189557.pdf?src-supplier=Verical, ComponentLink8URL=https://datasheet.ciiva.com/15189/getdatasheetpartid-329469-15189557.pdf?src-supplier=Verical, Construction=Chip, JESD-609 Code=e3, Manufacturer Part Number=RC0402JR-0727KL, Mounting Technology="Surface Mount", Packaging="Tape and Reel", Pins=2, Pricing="10000=0.0011, 100000=0.001, 300000=0.001, 750000=0.001, 2000000=0.0009 (USD)", Reach SVHC Compliant=Yes, RoHS=Yes, RoHS Compliant=Yes, Stock=360000, Supplier="Future Electronics", Technology="METAL GLAZE/THICK FILM", Terminal Finish=Nickel, Termination=Wraparound
R10: library part RC0402JR-074K7L, "Fixed Resistor, Metal Glaze/thick Film, 0.0625W, 4700ohm, 50V, 5% +/-Tol, 100ppm/Cel, Surface Mount, 0402", Case/Package=0402, LCSC PART NUMBER=C105870, Manufacturer=Yageo, Max Operating Temperature=155°C, Min Operating Temperature=-55°C, Package Height=0.35mm, Package Length=1mm, Package Shape=Rectangular, Package Style=SMTMeter, Package Width=0.5mm, Power=62.5mW, Rated Temperature=70°C, Resistor Type="FIXED RESISTOR", Supplier Part Number=4909339, Temperature Coefficient=100ppm/°C, Tolerance=5%, Working Voltage=50V, Additional Feature="LASER TRIMMABLE", Category="Chip SMD Resistors", ComponentLink1Description=https://datasheet.ciiva.com:443/pdfs/VipMasterIC/IC/YAGO/YAGO-S-A0008145938/YAGO-S-A0008145938-1.pdf?src-supplier=IHS+Markit, ComponentLink1URL=https://datasheet.ciiva.com:443/pdfs/VipMasterIC/IC/YAGO/YAGO-S-A0008145938/YAGO-S-A0008145938-1.pdf?src-supplier=IHS+Markit, ComponentLink2Description=https://datasheet.ciiva.com/46412/1018594-46412841.pdf?src-supplier=Element14, ComponentLink2URL=https://datasheet.ciiva.com/46412/1018594-46412841.pdf?src-supplier=Element14, ComponentLink3Description=https://datasheet.ciiva.com/2452/pyu-r-int-thick-7-2452612.pdf?src-supplier=Digikey, ComponentLink3URL=https://datasheet.ciiva.com/2452/pyu-r-int-thick-7-2452612.pdf?src-supplier=Digikey, ComponentLink4Description=https://datasheet.ciiva.com/2452/pyu-r-int-thick-7-2452613.pdf?src-supplier=Digikey, ComponentLink4URL=https://datasheet.ciiva.com/2452/pyu-r-int-thick-7-2452613.pdf?src-supplier=Digikey, ComponentLink5Description=https://datasheet.ciiva.com/2452/pyu-r-int-thick-7-2452611.pdf?src-supplier=Digikey, ComponentLink5URL=https://datasheet.ciiva.com/2452/pyu-r-int-thick-7-2452611.pdf?src-supplier=Digikey, ComponentLink6Description=https://datasheet.ciiva.com/7850/1018594-7850223.pdf?src-supplier=Element14, ComponentLink6URL=https://datasheet.ciiva.com/7850/1018594-7850223.pdf?src-supplier=Element14, ComponentLink7Description=https://datasheet.ciiva.com/7850/1018594-7850222.pdf?src-supplier=Element14, ComponentLink7URL=https://datasheet.ciiva.com/7850/1018594-7850222.pdf?src-supplier=Element14, ComponentLink8Description=https://datasheet.ciiva.com/16800/pyu-rc0402-51-rohs-l-6-r-16800266.pdf?src-supplier=Future+Electronics, ComponentLink8URL=https://datasheet.ciiva.com/16800/pyu-rc0402-51-rohs-l-6-r-16800266.pdf?src-supplier=Future+Electronics, Construction=Chip, JESD-609 Code=e3, Manufacturer Part Number=RC0402JR-074K7L, Mounting Technology="Surface Mount", Packaging="Tape and Reel", Pins=2, Pricing="10000=0.0008, 100000=0.0007, 300000=0.0007, 750000=0.0007, 2000000=0.0006 (USD)", Reach SVHC Compliant=Yes, RoHS=Yes, RoHS Compliant=Yes, Stock=17840000, Supplier="Future Electronics", Technology="METAL GLAZE/THICK FILM", Terminal Finish=Nickel, Termination=Wraparound
R11 R14 R17 R20 R21: library part AC0402FR-075K1L, "Fixed Resistor, Metal Glaze/thick Film, 0.0625W, 5100ohm, 50V, 1% +/-Tol, 100ppm/Cel, Surface Mount, 0402", Case/Package=0402, LCSC PART NUMBER=C144745, Manufacturer=Yageo, Max Operating Temperature=155°C, Min Operating Temperature=-55°C, Package Height=0.32mm, Package Length=1mm, Package Shape=Rectangular, Package Style=SMTMeter, Package Width=0.5mm, Power=62.5mW, Rated Temperature=70°C, Resistor Type="FIXED RESISTOR", Supplier Part Number=8112408, Temperature Coefficient=100ppm/°C, Tolerance=1%, Working Voltage=50V, Additional Feature="LASER TRIMMABLE", Category="Chip SMD Resistors", ComponentLink1Description=https://datasheet.ciiva.com:443/pdfs/VipMasterIC/IC/YAGO/YAGO-S-A0003597364/YAGO-S-A0003597364-1.pdf?src-supplier=IHS+Markit, ComponentLink1URL=https://datasheet.ciiva.com:443/pdfs/VipMasterIC/IC/YAGO/YAGO-S-A0003597364/YAGO-S-A0003597364-1.pdf?src-supplier=IHS+Markit, ComponentLink2Description=https://datasheet.octopart.com/AC0402FR-075K1L-Yageo-datasheet-166720450.pdf?src-supplier=Future+Electronics, ComponentLink2URL=https://datasheet.octopart.com/AC0402FR-075K1L-Yageo-datasheet-166720450.pdf?src-supplier=Future+Electronics, ComponentLink3Description=http://www.yageo.com/documents/recent/PYu-AC_51_RoHS_L_2_revised.pdf?src-supplier=Future+Electronics, ComponentLink3URL=http://www.yageo.com/documents/recent/PYu-AC_51_RoHS_L_2_revised.pdf?src-supplier=Future+Electronics, Construction=Chip, JESD-609 Code=e3, Manufacturer Part Number=AC0402FR-075K1L, Mounting Technology="Surface Mount", Packaging="Tape and Reel", Pins=2, Pricing="10000=0.0012, 50000=0.0011, 300000=0.001, 1000000=0.001, 3000000=0.0009 (USD)", Reach SVHC Compliant=Yes, Reference Standard=AEC-Q200, RoHS=Yes, RoHS Compliant=Yes, Stock=180000, Supplier="Future Electronics", Technology="METAL GLAZE/THICK FILM", Terminal Finish=Nickel, Termination=Wraparound
R18 R26: library part 0603WAF1001T5E, LCSC PART NUMBER=C21190, Manufacturer="Royal Electronic Factory", Supplier Part Number=303-0603WAF1001T5E, Category=LDO, ComponentLink1Description=https://datasheet.octopart.com/0603WAF1001T5E-Royal-Ohm-datasheet-165785611.pdf?src-supplier=TME, ComponentLink1URL=https://datasheet.octopart.com/0603WAF1001T5E-Royal-Ohm-datasheet-165785611.pdf?src-supplier=TME, Manufacturer Part Number=0603WAF1001T5E, Pricing="10000=0.001 (USD)", RoHS=No, Stock=310000, Supplier=Mouser
R27: library part RC0402FR-0751KL, "Fixed Resistor, Metal Glaze/thick Film, 0.0625W, 51000ohm, 50V, 1% +/-Tol, 100ppm/Cel, Surface Mount, 0402", Case/Package=0402, LCSC PART NUMBER=C107229, Manufacturer=Yageo, Max Operating Temperature=155°C, Min Operating Temperature=-55°C, Package Height=0.35mm, Package Length=1mm, Package Shape=Rectangular, Package Style=SMTMeter, Package Width=0.5mm, Power=62.5mW, Rated Temperature=70°C, Resistor Type="FIXED RESISTOR", Supplier Part Number=311-51.0KLRTR-ND, Temperature Coefficient=100ppm/°C, Tolerance=1%, Working Voltage=50V, Additional Feature="LASER TRIMMABLE", Category="Chip SMD Resistors", ComponentLink1Description=https://datasheet.ciiva.com:443/pdfs/VipMasterIC/IC/YAGO/YAGO-S-A0008145938/YAGO-S-A0008145938-1.pdf?src-supplier=IHS+Markit, ComponentLink1URL=https://datasheet.ciiva.com:443/pdfs/VipMasterIC/IC/YAGO/YAGO-S-A0008145938/YAGO-S-A0008145938-1.pdf?src-supplier=IHS+Markit, ComponentLink2Description=https://datasheet.ciiva.com/2519/pyu-r-int-thick-7-2519211.pdf?src-supplier=Digikey, ComponentLink2URL=https://datasheet.ciiva.com/2519/pyu-r-int-thick-7-2519211.pdf?src-supplier=Digikey, ComponentLink3Description=https://datasheet.ciiva.com/2519/pyu-r-int-thick-7-2519212.pdf?src-supplier=Digikey, ComponentLink3URL=https://datasheet.ciiva.com/2519/pyu-r-int-thick-7-2519212.pdf?src-supplier=Digikey, ComponentLink4Description=https://datasheet.ciiva.com/2519/pyu-r-int-thick-7-2519210.pdf?src-supplier=Digikey, ComponentLink4URL=https://datasheet.ciiva.com/2519/pyu-r-int-thick-7-2519210.pdf?src-supplier=Digikey, ComponentLink5Description=https://datasheet.ciiva.com/7850/1018594-7850037.pdf?src-supplier=Element14, ComponentLink5URL=https://datasheet.ciiva.com/7850/1018594-7850037.pdf?src-supplier=Element14, Construction=Chip, JESD-609 Code=e3, Manufacturer Part Number=RC0402FR-0751KL, Mounting Technology="Surface Mount", Packaging="Tape and Reel", Pins=2, Pricing="10000=0.00261, 20000=0.00231, 30000=0.00216, 50000=0.00199, 100000=0.00179 (USD)", Reach SVHC Compliant=Yes, RoHS=Yes, RoHS Compliant=Yes, Stock=170000, Supplier=Digikey, Technology="METAL GLAZE/THICK FILM", Terminal Finish=Nickel, Termination=Wraparound
R28: library part RC0402FR-0722K1L, "Fixed Resistor, Metal Glaze/thick Film, 0.0625W, 22100ohm, 50V, 1% +/-Tol, 100ppm/Cel, Surface Mount, 0402", Case/Package=0402, LCSC PART NUMBER=C163478, Manufacturer=Yageo, Max Operating Temperature=155°C, Min Operating Temperature=-55°C, Package Height=0.35mm, Package Length=1mm, Package Shape=Rectangular, Package Style=SMTMeter, Package Width=0.5mm, Power=62.5mW, Rated Temperature=70°C, Resistor Type="FIXED RESISTOR", Supplier Part Number=311-22.1KLRTR-ND, Temperature Coefficient=100ppm/°C, Tolerance=1%, Working Voltage=50V, Additional Feature="LASER TRIMMABLE", Category="Chip SMD Resistors", ComponentLink1Description=https://datasheet.ciiva.com:443/pdfs/VipMasterIC/IC/YAGO/YAGO-S-A0008145938/YAGO-S-A0008145938-1.pdf?src-supplier=IHS+Markit, ComponentLink1URL=https://datasheet.ciiva.com:443/pdfs/VipMasterIC/IC/YAGO/YAGO-S-A0008145938/YAGO-S-A0008145938-1.pdf?src-supplier=IHS+Markit, ComponentLink2Description=https://datasheet.ciiva.com/7983/1018594-7983501.pdf?src-supplier=Element14, ComponentLink2URL=https://datasheet.ciiva.com/7983/1018594-7983501.pdf?src-supplier=Element14, ComponentLink3Description=https://datasheet.ciiva.com/2553/pyu-r-int-thick-7-2553201.pdf?src-supplier=Digikey, ComponentLink3URL=https://datasheet.ciiva.com/2553/pyu-r-int-thick-7-2553201.pdf?src-supplier=Digikey, ComponentLink4Description=https://datasheet.ciiva.com/2553/pyu-r-int-thick-7-2553202.pdf?src-supplier=Digikey, ComponentLink4URL=https://datasheet.ciiva.com/2553/pyu-r-int-thick-7-2553202.pdf?src-supplier=Digikey, Construction=Chip, JESD-609 Code=e3, Manufacturer Part Number=RC0402FR-0722K1L, Mounting Technology="Surface Mount", Packaging="Tape and Reel", Pins=2, Pricing="10000=0.00261, 20000=0.00231, 30000=0.00216, 50000=0.00199, 100000=0.00179 (USD)", Reach SVHC Compliant=Yes, RoHS=Yes, RoHS Compliant=Yes, Stock=140000, Supplier=Digikey, Technology="METAL GLAZE/THICK FILM", Terminal Finish=Nickel, Termination=Wraparound
SW1 SW2: "Keypad Switch, 1 Switches, SPST, Momentary-tactile, 0.05A, 12VDC, 1.57N, 4 PCB Hole Cnt, Solder Terminal, Surface Mount-straight", Contact Current(DC)-Max=50mA, Contact DC Max Rating R Load=0.05A@12VDC, Contact Resistance=0.1mR, Contact Voltage(DC)-Max=12V, Dielectric Withstand Volts=250VACV, Insulation Resistance=100GR, LCSC PART NUMBER=C221880, Manufacturer="ITT C&K", Max Operating Temperature=60°C, Min Operating Temperature=-20°C, Supplier Part Number=611-PTS645SM43SMTR92, Actuator Type=Pushbutton, Body Breadth=5.9944inch, Body Height=3.4544mm, Body Length or Diameter=5.9944mm, Category="Tactile Switches", ComponentLink1Description=https://datasheet.ciiva.com:443/pdfs/VipMasterIC/IC/CKCI/CKCI-S-A0001796527/CKCI-S-A0001796842-1.pdf?src-supplier=IHS+Markit, ComponentLink1URL=https://datasheet.ciiva.com:443/pdfs/VipMasterIC/IC/CKCI/CKCI-S-A0001796527/CKCI-S-A0001796842-1.pdf?src-supplier=IHS+Markit, ComponentLink2Description=https://datasheet.ciiva.com/29903/getdatasheetpartid-786341-29903846.pdf?src-supplier=Verical, ComponentLink2URL=https://datasheet.ciiva.com/29903/getdatasheetpartid-786341-29903846.pdf?src-supplier=Verical, ComponentLink3Description=https://datasheet.ciiva.com/29931/getdatasheetpartid-764615-29931183.pdf?src-supplier=Verical, ComponentLink3URL=https://datasheet.ciiva.com/29931/getdatasheetpartid-764615-29931183.pdf?src-supplier=Verical, ComponentLink4Description=https://datasheet.ciiva.com/14920/pts645-14920734.pdf?src-supplier=Digikey, ComponentLink4URL=https://datasheet.ciiva.com/14920/pts645-14920734.pdf?src-supplier=Digikey, ComponentLink5Description=https://datasheet.ciiva.com/14920/pts645-14920735.pdf?src-supplier=Digikey, ComponentLink5URL=https://datasheet.ciiva.com/14920/pts645-14920735.pdf?src-supplier=Digikey, ComponentLink6Description=https://datasheet.ciiva.com/14920/pts645-14920733.pdf?src-supplier=Digikey, ComponentLink6URL=https://datasheet.ciiva.com/14920/pts645-14920733.pdf?src-supplier=Digikey, Electrical Life=100000Cycles, JESD-609 Code=e4, Manufacturer Part Number=PTS645SM43SMTR92LFS, Mounting Technology="Surface Mount", PCB Hole Count=4, Pricing="1=0.23, 10=0.207, 50=0.207, 100=0.181, 1000=0.148, 10000=0.144 (USD)", Reach SVHC Compliant=Yes, RoHS=Yes, RoHS Compliant=Yes, Stock=63870, Supplier=Mouser, Switch Action=MOMENTARY, Switch Function=SPST, Switch Type=Keypad, Terminal Finish=Silver, Terminal Length=0.138inch, Termination=Solder